# Altium PCB controladorVooDrone.PcbDoc
Units mil, origin at the board's own origin, x right, y up, seen from the top; angles counter-clockwise.
Board outline 6000 x 4000 mil, 2 copper layers (Top Layer, Bottom Layer); 16 components, 10 nets, 36 pads, 0 vias.
Unrouted connection lines stored in the file: 26.
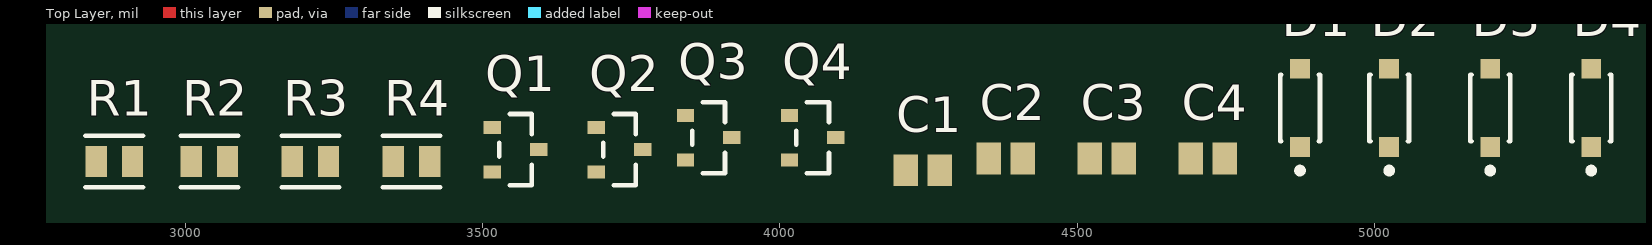
[diagram p0: Top Layer view]
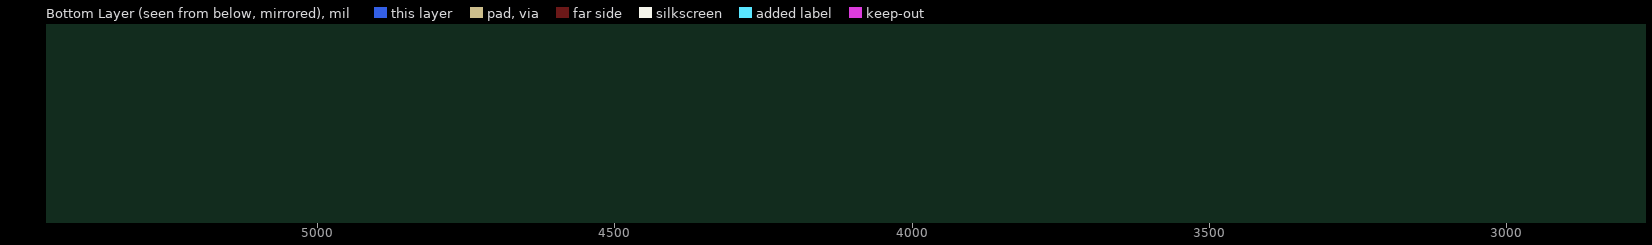
[diagram p1: Bottom Layer view, seen from below]

## Layer stack, top to bottom
Top Solder: solder mask 0.4, Solder Resist, Dk 3.5
Top Layer: signal copper 1.4
Dielectric 1: dielectric 12.6, FR-4, Dk 4.8
Bottom Layer: signal copper 1.4
Bottom Solder: solder mask 0.4, Solder Resist, Dk 3.5

## Board outline
1000,1000 7000,1000 7000,5000 1000,5000

## Design rules (kind name [scope] priority, off if disabled: settings)
Clearance [All] p1: gap=10 ignorepadtopadclearanceinfootprint=FALSE
PolygonConnect [All] p1: connectstyle=Relief reliefconductorwidth=10 reliefentries=4 polygonreliefangle="90 Angle" airgapwidth=10
RoutingVias [All] p1: holewidth=28 width=50 viastyle="Through Hole" minholewidth=28 minwidth=50 maxholewidth=28 maxwidth=50
SolderMaskExpansion [All] p1: expansion=4 istentingtop=FALSE
SupplyNets "Schematic Supply Nets_9" [InNet('+5')] p1: voltage=0.000
SupplyNets "Schematic Supply Nets_8" [InNet('P8')] p2: voltage=0.000
SupplyNets "Schematic Supply Nets_7" [InNet('P6')] p3: voltage=0.000
SupplyNets "Schematic Supply Nets_6" [InNet('Motor3')] p4: voltage=0.000
SupplyNets "Schematic Supply Nets_5" [InNet('P2')] p5: voltage=0.000
SupplyNets "Schematic Supply Nets_4" [InNet('Motor4')] p6: voltage=0.000
SupplyNets "Schematic Supply Nets_3" [InNet('P4')] p7: voltage=0.000
SupplyNets "Schematic Supply Nets_2" [InNet('Motor1')] p8: voltage=0.000
SupplyNets "Schematic Supply Nets_1" [InNet('GND')] p9: voltage=0.000
SupplyNets "Schematic Supply Nets" [InNet('Motor2')] p10: voltage=0.000
Width [All] p1: maxlimit=10 minlimit=10 preferedwidth=10
30 further rules are at their usual default settings.

## Components (designator, comment, footprint, x,y, rotation, side; value= is the part's Value field where it differs from the comment)
C1 "VJ0805Y105JXQTW1BC" CAPC2013X145X50LL20T20 4240,2735 r0 top
C2 "VJ0805Y105JXQTW1BC" CAPC2013X145X50LL20T20 4380,2755 r0 top
C3 "VJ0805Y105JXQTW1BC" CAPC2013X145X50LL20T20 4550,2755 r0 top
C4 "VJ0805Y105JXQTW1BC" CAPC2013X145X50LL20T20 4720,2755 r0 top
D1 "1N4148W-G3-08" FP-S8-V-3910_01-001-MFG 4875,2840 r90 top
D2 "1N4148W-G3-08" FP-S8-V-3910_01-001-MFG 5025,2840 r90 top
D3 "1N4148W-G3-08" FP-S8-V-3910_01-001-MFG 5195,2840 r90 top
D4 "1N4148W-G3-08" FP-S8-V-3910_01-001-MFG 5365,2840 r90 top
Q1 "SI2300DS-T1-GE3" FP-S-03946-MFG 3555,2770 r0 top
Q2 "SI2300DS-T1-GE3" FP-S-03946-MFG 3730,2770 r0 top
Q3 "SI2300DS-T1-GE3" FP-S-03946-MFG 3880,2790 r0 top
Q4 "SI2300DS-T1-GE3" FP-S-03946-MFG 4055,2790 r0 top
R1 "CRGCQ0805J10K" FP-CRGCQ0805-IPC_C 2880,2750 r0 top value=10KΩ
R2 "CRGCQ0805J10K" FP-CRGCQ0805-IPC_C 3040,2750 r0 top value=10KΩ
R3 "CRGCQ0805J10K" FP-CRGCQ0805-IPC_C 3210,2750 r0 top value=10KΩ
R4 "CRGCQ0805J10K" FP-CRGCQ0805-IPC_C 3380,2750 r0 top value=10KΩ

## Footprints (in the part's own frame and the unit in brackets; to place one, negate y for a bottom-side part, rotate by r counter-clockwise, add the part's x,y. Pads: shape width x height; smd on the part's side, far side on the other; paste and mask are expansions set on the pad)
CAPC2013X145X50LL20T20 [mm] "Chip Capacitor, 2-Leads, Body 2.00x1.25mm, IPC High Density"
  rect 1.05x1.35 smd: 1(-0.725,0) 2(0.725,0)
  body extent -1.1,-0.72 1.1,0.72, height 1.45
FP-CRGCQ0805-IPC_C [mil]
  rect 35.67x51.57 smd paste+0 mask+0: 1(-30.55,0) 2(30.55,0)
  silkscreen extent -48,-43 48,43, body extent -52,-31 52,31, height 10
FP-S8-V-3910_01-001-MFG [mm]
  rect 0.85x0.85 smd paste+0 mask+0: 1(-1.675,0) 2(1.675,0)
  silkscreen extent -2.8,-0.85 1.43,0.85, body extent -2.2,-0.95 2.2,0.95, height 0.25
FP-S-03946-MFG [mil]
  rect 29x22 smd paste+0 mask+0: 1(-39,37.5) 2(-39,-37.5) 3(39,0)
  silkscreen extent -28,-60 28,60, body extent -57,-64 57,64, height 10

## Part data
C1 C2 C3 C4: library part CMP-1036-04736-2, Manufacturer=Vitramon, Part Number=VJ0805Y105JXQTW1BC
D1 D2 D3 D4: library part CMP-00030-46456310-1, "1N4148W-G3-08 Rectifier Diode, 1 Phase, 1 Element, 0.15A, 100V V(RRM), Silicon", Average Rectified Current=150mA, Case/Package=SOD, Forward Voltage=1.2V, Max Operating Temperature=150°C, Max Repetitive Reverse Voltage (Vrrm)=100V, Max Reverse Voltage (DC)=75V, Min Operating Temperature=-55°C, Peak Non-Repetitive Surge Current=500mA, Contact Plating=Tin, Element Configuration=Single, Forward Current=150mA, Mount="Surface Mount", NexarPartId=46456310, Number of Pins=2, Reverse Recovery Time=4ns, RoHS=Compliant, Schedule B="8541100070, 8541100070", Weight=9.412042mg
Q1 Q2 Q3 Q4: library part CMP-02550-000182-1, "MOSFET N-CH 30V 3.6A SOT-23", Continuous Drain Current=3.1A, Drain To Source Breakdown Voltage=30V, Drain To Source Resistance=0.055Ω, Gate To Source Voltage=12V, Input Capacitace At Vds="320pF @ 15V", Manufacturer=Vishay, Max Forward Diode Voltage=1.2V, Max Junction Temp=+150°C, Package=S-03946, Power Dissipation=1.1W, Pulse Drain Current=15A, Temperature="-55°C to +150°C", Temperature Range Low=-55°C, Typ Forward Diode Voltage=0.8V, Automotive=No, Category=Trans, ComponentLink2Description=Datasheet, ComponentLink2URL=http://www.vishay.com/docs/65701/si2300ds.pdf, Depletion Mode=False, Device Class L1="Discrete Semiconductors", Device Class L2=Transistors, Device Class L3=MOSFETs, Digikey Description="MOSFET N-CH 30V 3.6A SOT-23", Drain To Source Voltage=30V, Gate Charge At Vgs="6.5nC @ 10V", Height=1.12mm, Ipc Land Pattern Name=SOT95P237X100-3, Lead Free=Yes, Manufacturer Part Number=SI2300DS-T1-GE3, Mouser Description="MOSFET 30V 3.6A N-CH MOSFET", Number Of Channels=1, Number Of N Channels=1, Octopart=https://octopart.com/si2300ds-t1-ge3-vishay-44451512, Reverse Recovery Charge=5nC, Reverse Recovery Time=11ns, RoHS=TRUE, Rthja Max=90°C/W, Standoff Height=0.01mm, Temperature Range High=+150°C, Threshold Vgs Max=1.5V, Threshold Vgs Min=0.6V, Transconductance=13S, Turn Off Delay Time=15ns, Turn On Delay Time=5ns
R1 R2 R3 R4: library part CMP-03211-002989-1, "CRGCQ 0805 10K 5%", Ambient Temperature Range High=+70°C, Manufacturer="TE Connectivity", Package=CRGCQ0805, Power Rating=0.125W, Resistance=10KΩ, Temperature="-55°C to +155°C", Temperature Coefficient=±100ppm/°C, Temperature Range High=+155°C, Temperature Range Low=-55°C, Tolerance=0.05, Voltage Rating=150V, Automotive=Yes, Automotive Grade="Grade 914", Category=Res, ComponentLink2Description=Datasheet, ComponentLink2URL=https://www.te.com/commerce/DocumentDelivery/DDEController?Action=showdoc&DocId=Data+Sheet%7F1773204-3%7F1%7Fpdf%7FEnglish%7FENG_DS_1773204-3_1.pdf%7F4-2176341-923, Composition="Thick Film", Device Class L1="Passive Components", Device Class L2=Resistors, Device Class L3="Chip SMD Resistors", Digikey Description="CRGCQ 0805 10K 5%", Height=0.65mm, Ipc Land Pattern Name=RESC200125X55, Lead Free=Yes, Manufacturer Part Number=CRGCQ0805J10K, Mouser Description="Res Thick Film 0805 10K Ohm 5% 0.125W(1/8W) ±100ppm/C Pad SMD Automotive T/R", Octopart=https://octopart.com/crgcq0805j10k-te+connectivity-91018201, RoHS=TRUE, Series=CRGCQ

## Nets (pads, with @x,y where several pads share a name; then routed paths per layer and width w, separated by ;. In a path a pad name is that pad's centre, name@x,y a point inside that pad or via, vN(x,y) a via of type N, cw(c..) or ccw(c..) an arc to the next point about the centre after c; other vN are vias at no path point)
+5: C1.2 C2.2 C3.2 C4.2 D1.1 D2.1 D3.1 D4.1
GND: Q1.2 Q2.2 Q3.2 Q4.2 R1.1 R2.1 R3.1 R4.1
Motor1: Q1.1 R1.2
Motor2: Q2.1 R2.2
Motor3: Q3.1 R3.2
Motor4: Q4.1 R4.2
P2: C4.1 D4.2 Q4.3
P4: C3.1 D3.2 Q3.3
P6: C2.1 D2.2 Q2.3
P8: C1.1 D1.2 Q1.3